# EAGLE board mouse_v3 (EAGLE 8.6.1)
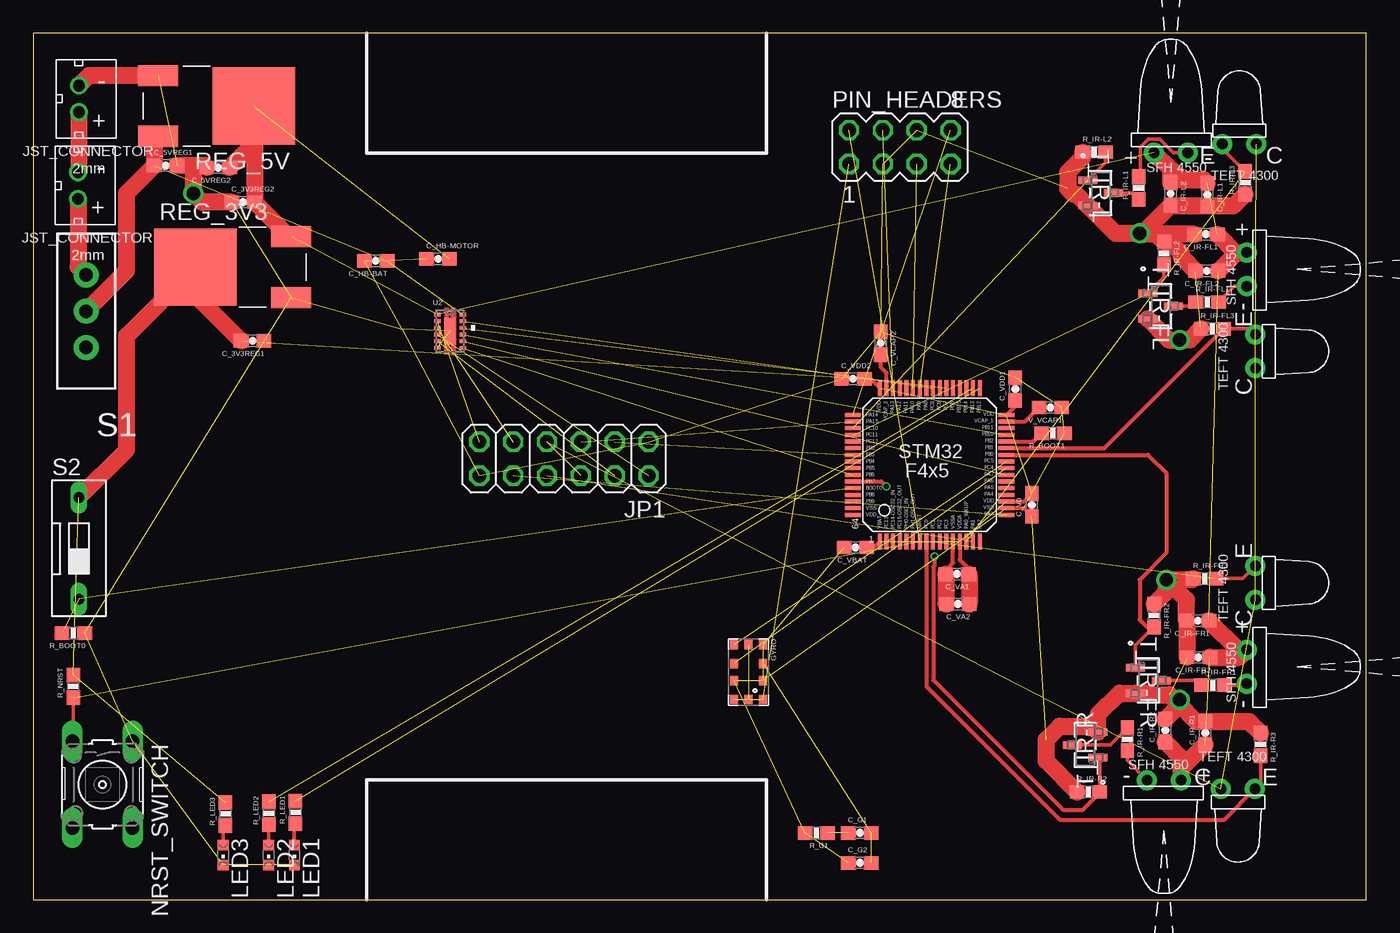
[diagram p0: board, top side]
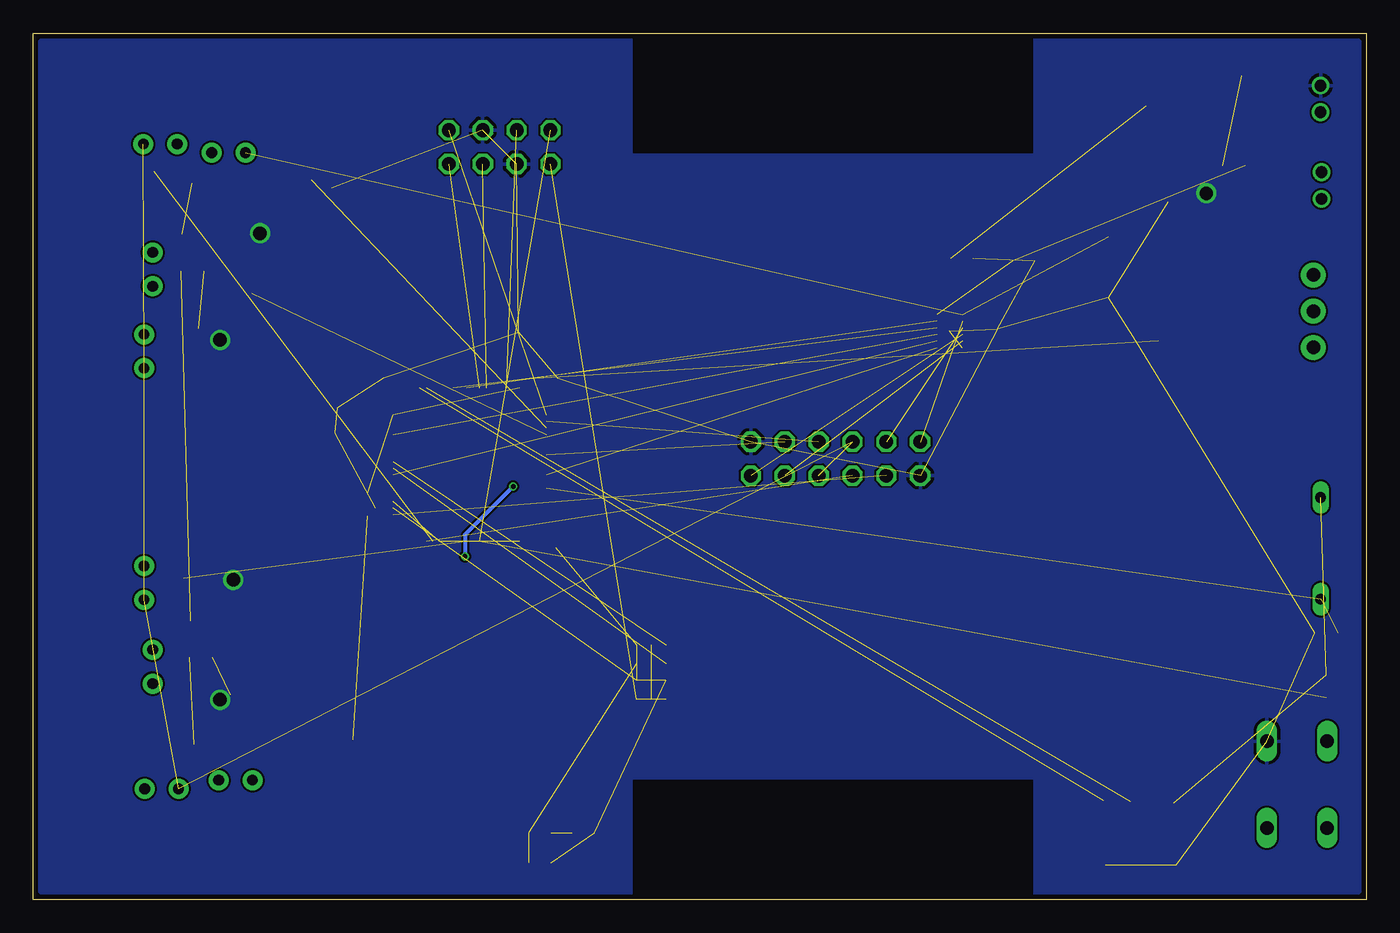
[diagram p1: board, bottom side, seen from below]

Size 100 x 65 mm. Coordinates in mm from the lower left corner, seen from the top.
Outline: 0,0 100,0 100,65 0,65 0,0
Copper layers (1*16): Top 0.035559375mm / dielectric 1.6mm / Bottom 0.035559375mm
Design rules "oshpark-2layer": minimum track width 6mil, minimum drill 10mil, track to track 6mil, track to pad 6mil, pad to pad 6mil, via to via 6mil, smd to smd 6mil, copper to edge 15mil, drill to drill 6mil, minimum pad ring 5mil, minimum via ring 5mil, stop-mask expansion 2.5mil, vias tented up to drill 0mil, thermal gap 10mil
tKeepout: area 25,56 to 55,65; area 25,0 to 55,9
bKeepout: area 25,0 to 55,9; area 25,56 to 55,65
tRestrict: area 25,0 to 55,9; area 25,56 to 55,65
bRestrict: area 25,0 to 55,9; area 25,56 to 55,65

## Footprints (pad centres in the part's own frame; a part is rotated, then mirrored left to right if it is on the bottom)
0603-CAP = smd 1.1 x 1: 1 -0.85,0; 2 0.85,0
10-TLGA = smd 0.7 x 0.6: 1 2.05,1.1; 2 0.635,1.1; 3 -0.635,1.1; 4 -2.05,1.1; 5 -2.05,0; 6 -2.05,-1.1; 7 -0.635,-1.1; 8 0.635,-1.1; 9 2.05,-1.1; 10 2.05,0
EMITTER = drill 0.8 pad 1.5: + -1.27,-0.5; - 1.27,-0.5
2X06 = drill 1.016 octagon: 1 -6.35,-1.27; 2 -6.35,1.27; 3 -3.81,-1.27; 4 -3.81,1.27; 5 -1.27,-1.27; 6 -1.27,1.27; 7 1.27,-1.27; 8 1.27,1.27; 9 3.81,-1.27; 10 3.81,1.27; 11 6.35,-1.27; 12 6.35,1.27
CHIPLED_0603 = smd 0.8 x 0.8: A 0,-0.75; C 0,0.75
B3F-10XX = drill 1.016 long: 1 -3.251,2.261; 2 3.251,2.261; 3 -3.251,-2.261; 4 3.251,-2.261
MA04-2 = drill 1.016 octagon: 1 -3.81,-1.27; 2 -3.81,1.27; 3 -1.27,-1.27; 4 -1.27,1.27; 5 1.27,-1.27; 6 1.27,1.27; 7 3.81,-1.27; 8 3.81,1.27
0603-RES = smd 1.1 x 1: 1 -0.85,0; 2 0.85,0
TO-252-3 = smd 3 x 1.6: 1 4.39,-2.285; 3 4.39,2.285 | smd 6.2 x 5.8: 4 -2.79,0
SWITCH-SPDT_KIT = drill 1.016 pad 1.88: 1 0,2.718; 2 0,0; 3 0,-2.718
DS-01 = drill 0.813 long: 1 0,-3.81; 2 0,3.81
SOT-23 = smd 0.559 x 1.422: 1 -0.953,-0.965; 2 0.953,-0.965; 3 0,0.965
DSS12_P9X2 = smd 0.5 x 0.28: 1 -0.959,1.25; 2 -0.959,0.75; 3 -0.959,0.25; 4 -0.959,-0.25; 5 -0.959,-0.75; 6 -0.959,-1.25; 7 0.959,-1.25; 8 0.959,-0.75; 9 0.959,-0.25; 10 0.959,0.25; 11 0.959,0.75; 12 0.959,1.25 | smd 0.9 x 2: 13 0,0
STM32F405/415_LQFP64 = smd 1.2 x 0.3: BOOT0 -5.75,-1.75; PA3 5.75,-3.75; PA4 5.75,-2.25; PA5 5.75,-1.75; PA6 5.75,-1.25; PA7 5.75,-0.75; PA14 -5.75,3.75; PA15 -5.75,3.25; PB0 5.75,0.75; PB1 5.75,1.25; PB2 5.75,1.75; PB3 -5.75,0.75; PB4 -5.75,0.25; PB5 -5.75,-0.25; PB6 -5.75,-0.75; PB7 -5.75,-1.25; PB8 -5.75,-2.25; PB9 -5.75,-2.75; PB10 5.75,2.25; PB11 5.75,2.75; PC4 5.75,-0.25; PC5 5.75,0.25; PC10 -5.75,2.75; PC11 -5.75,2.25; PC12 -5.75,1.75; PD2 -5.75,1.25; VCAP_1 5.75,3.25; VDD_0 5.75,-2.75; VDD_1 5.75,3.75; VDD_3 -5.75,-3.75; VSS_0 5.75,-3.25; VSS_1 -5.75,-3.25 | smd 0.3 x 1.2: NRST -0.75,-5.75; PA0_WKUP 2.75,-5.75; PA1 3.25,-5.75; PA2 3.75,-5.75; PA8 -0.25,5.75; PA9 -0.75,5.75; PA10 -1.25,5.75; PA11 -1.75,5.75; PA12 -2.25,5.75; PA13 -2.75,5.75; PB12 3.75,5.75; PB13 3.25,5.75; PB14 2.75,5.75; PB15 2.25,5.75; PC0 -0.25,-5.75; PC1 0.25,-5.75; PC2 0.75,-5.75; PC3 1.25,-5.75; PC6 1.75,5.75; PC7 1.25,5.75; PC8 0.75,5.75; PC9 0.25,5.75; PC13 -3.25,-5.75; PC14 -2.75,-5.75; PC15 -2.25,-5.75; PH0 -1.75,-5.75; PH1 -1.25,-5.75; VBAT -3.75,-5.75; VCAP_2 -3.25,5.75; VDD_2 -3.75,5.75; VDDA 2.25,-5.75; VSSA 1.75,-5.75
JST_CONNECTOR_FEMALE = drill 0.889: + 0,1; - 0,-1
RECEIVER = drill 0.8 pad 1.5: C 1.27,-0.5; E -1.27,-0.5
SPLITTER = smd 0.102 x 0.102: 1 0,0; 2 0,0

## Placement (x,y rotation side)
C_3V3REG1  10uF  [0603-CAP]  16.45,41.92 180 top
C_3V3REG2  0.1uF  [0603-CAP]  15.74,52.33 0 top
C_5VREG1  0.33uF  [0603-CAP]  9.93,55.08 0 top
C_5VREG2  0.1uF  [0603-CAP]  13.88,54.92 180 top
C_G1  470nF  [0603-CAP]  62,5 0 top
C_G2  10nF  [0603-CAP]  62,2.75 0 top
C_HB-BAT  0.1uF  [0603-CAP]  25.69,47.92 180 top
C_HB-MOTOR  0.1uF  [0603-CAP]  30.36,48.08 0 top
C_IR-FL1  0.1uF  [0603-CAP]  87.98,49.92 180 top
C_IR-FL2  4.7uF  [0603-CAP]  88.04,47.17 180 top
C_IR-FR1  0.1uF  [0603-CAP]  87.36,20.92 180 top
C_IR-FR2  4.7uF  [0603-CAP]  87.42,18.17 180 top
C_IR-L1  0.1uF  [0603-CAP]  88.08,52.89 270 top
C_IR-L2  4.7uF  [0603-CAP]  85.33,52.95 270 top
C_IR-R1  0.1uF  [0603-CAP]  87.92,12.49 90 top
C_IR-R2  4.7uF  [0603-CAP]  84.92,12.68 90 top
C_V0  0.1uF  [0603-CAP]  74.92,29.62 90 top
C_VA1  0.1uF  [0603-CAP]  69.31,24.42 180 top
C_VA2  4.7uF  [0603-CAP]  69.37,22.17 180 top
C_VBAT  0.1uF  [0603-CAP]  61.68,26.42 180 top
C_VCAP2  2.2uF  [0603-CAP]  63.58,41.74 270 top
C_VDD1  0.1uF  [0603-CAP]  73.67,38.31 90 top
C_VDD2  0.1uF  [0603-CAP]  61.5,39.08 0 top
GYRO  LY3200ALH  [10-TLGA]  53.65,17.07 270 top
IR_FL  EMITTER  [EMITTER]  91.54,47.29 270 top
IR_FR  EMITTER  [EMITTER]  91.54,17.47 270 top
IR_L  EMITTER  [EMITTER]  85.35,56.54 0 top
IR_R  EMITTER  [EMITTER]  84.83,8.46 180 top
JP1  [2X06]  39.81,33.08 180 top
LED1  BLUE  [CHIPLED_0603]  19.58,3.35 180 top
LED2  RED  [CHIPLED_0603]  17.66,3.35 180 top
LED3  GREEN  [CHIPLED_0603]  14.24,3.35 180 top
NRST_SWITCH  [B3F-10XX]  5.19,8.63 270 top
PIN_HEADERS  [MA04-2]  65.01,56.46 0 top
R_BOOT0  10K  [0603-RES]  3,20 180 top
R_BOOT1  10K  [0603-RES]  76.5,35 180 top
R_G1  10K  [0603-RES]  58.75,5 180 top
R_IR-FL1  51  [0603-RES]  88.07,44.83 0 top
R_IR-FL2  47K  [0603-RES]  84.83,48.49 270 top
R_IR-FL3  1.8K  [0603-RES]  88.45,42.83 0 top
R_IR-FR1  51  [0603-RES]  88.5,16.08 0 top
R_IR-FR2  47K  [0603-RES]  84.08,21.31 270 top
R_IR-FR3  1.8K  [0603-RES]  87.88,24.08 0 top
R_IR-L1  51  [0603-RES]  82.92,53.4 90 top
R_IR-L2  47K  [0603-RES]  79.59,56.08 0 top
R_IR-L3  1.8K  [0603-RES]  90.92,53.78 90 top
R_IR-R1  51  [0603-RES]  82.08,12.03 270 top
R_IR-R2  47K  [0603-RES]  79.16,8.08 0 top
R_IR-R3  1.8K  [0603-RES]  92.08,11.65 270 top
R_LED1  100  [0603-RES]  19.67,6.54 90 top
R_LED2  330  [0603-RES]  17.67,6.48 90 top
R_LED3  330  [0603-RES]  14.42,6.42 90 top
R_NRST  10K  [0603-RES]  3,16 90 top
REG_3V3  MC33269  [TO-252-3]  14.95,47.46 0 top
REG_5V  MC7805  [TO-252-3]  13.75,59.54 180 top
S1  [SWITCH-SPDT_KIT]  3.96,44.15 180 top
S2  [DS-01]  3.42,26.35 0 top
T_IR-FL  MMBF170LT1G  [SOT-23]  84.58,44.53 270 top
T_IR-FR  MMBF170LT1G  [SOT-23]  83.65,16.44 270 top
T_IR-L  MMBF170LT1G  [SOT-23]  80.08,53.02 270 top
T_IR-R  MMBF170LT1G  [SOT-23]  78.92,11.6 90 top
U2  DRV8835DSSR  [DSS12_P9X2]  31.26,42.65 0 top
U$1  STM32F405/415_LQFP64  [STM32F405/415_LQFP64]  67.26,32.62 0 top
U$2  JST_CONNECTOR_FEMALE  [JST_CONNECTOR_FEMALE]  3.42,60.08 180 top
U$3  JST_CONNECTOR_FEMALE  [JST_CONNECTOR_FEMALE]  3.35,53.58 180 top
U$4  RECEIVER  [RECEIVER]  90.48,57.19 0 top
U$5  RECEIVER  [RECEIVER]  92.19,41.14 270 top
U$6  RECEIVER  [RECEIVER]  92.19,23.76 270 top
U$7  RECEIVER  [RECEIVER]  90.38,7.81 180 top
U$8  SPLITTER  [SPLITTER]  27.66,42.81 0 top
V_VCAP1  2.2uF  [0603-CAP]  76.3,36.92 180 top

## Library data of the parts
C_3V3REG1 C_3V3REG2 C_5VREG1 C_5VREG2 C_G1 C_G2 C_HB-BAT C_HB-MOTOR C_IR-FL1 C_IR-FL2 C_IR-FR1 C_IR-FR2 C_IR-L1 C_IR-L2 C_IR-R1 C_IR-R2 C_V0 C_VA1 C_VA2 C_VBAT C_VCAP2 C_VDD1 C_VDD2 S1 V_VCAP1 = SparkFun
GYRO = LY3200ALH
IR_FL IR_FR IR_L IR_R U$4-U$7 = sfh4550 _ teft4300
JP1 = pinhead
LED1-LED3 = led
NRST_SWITCH = switch-omron; MPN: B3F-1000; OC_FARNELL: 176432; OC_NEWARK: 36M3542
PIN_HEADERS = con-lstb; OC_FARNELL: unknown; OC_NEWARK: unknown
R_BOOT0 R_BOOT1 R_G1 R_IR-FL1-R_IR-FL3 R_IR-FR1-R_IR-FR3 R_IR-L1-R_IR-L3 R_IR-R1-R_IR-R3 R_LED1-R_LED3 R_NRST = SparkFun-Resistors; PROD_ID: RES-09119
REG_3V3 REG_5V = MC33269
S2 = switch-dil; OC_FARNELL: unknown; OC_NEWARK: unknown
T_IR-FL T_IR-FR T_IR-L T_IR-R = MMBF170LT1; MANUFACTURER_PART_NUMBER: MMBF170LT1G; VENDOR: ON Semiconductor
U2 = DRV8835; MANUFACTURER_PART_NUMBER: DRV8835DSSR; VENDOR: Texas Instruments
U$1 = STM32F10x F4xx
U$2 U$3 = JST_CONNECTOR_FEMALE. through hole
U$8 = splitter

## Nets
3.3V: GYRO.1 GYRO.5 GYRO.9 GYRO.10 PIN_HEADERS.1
3V3: C_3V3REG1.2 C_V0.2 C_VA1.1 C_VA2.1 C_VBAT.1 C_VDD1.1 C_VDD2.2 R_LED3.2 R_NRST.2 REG_3V3.4 S2.2 U$1.VBAT U$1.VDD_0 U$1.VDD_1 U$1.VDD_2 U$1.VDDA
3V3_NUCLEO: JP1.6 JP1.7 U$4.C U$5.C U$6.C U$7.C
5V: C_3V3REG2.2 C_5VREG2.1 C_HB-MOTOR.2 C_IR-FL1.1 C_IR-FL2.1 C_IR-FR1.1 C_IR-FR2.1 C_IR-L1.1 C_IR-L2.1 C_IR-R1.1 C_IR-R2.1 IR_FL.+ IR_FR.+ IR_L.+ IR_R.+ REG_3V3.3 REG_5V.4 U2.1
AGND: C_VA1.2 C_VA2.2 U$1.VSSA
BAT: C_5VREG1.1 C_HB-BAT.1 REG_5V.3 S1.2 U2.12
BOOT0: R_BOOT0.2 S2.1 U$1.BOOT0
BOOT1: R_BOOT1.2 U$1.PB2
EMIT_FL: R_IR-FL2.2 T_IR-FL.1 U$1.PC11
EMIT_FR: R_IR-FR2.2 T_IR-FR.1 U$1.PB0
EMIT_L: R_IR-L2.2 T_IR-L.1 U$1.PC10
EMIT_R: R_IR-R2.2 T_IR-R.1 U$1.PB7
ENC_A1: JP1.5 U$1.PA15
ENC_A2: JP1.8 U$1.PA1
ENC_B1: JP1.3 U$1.PB3
ENC_B2: JP1.10 U$1.PA3
GND: C_3V3REG1.1 C_3V3REG2.1 C_5VREG1.2 C_5VREG2.2 C_G2.1 C_IR-FL1.2 C_IR-FL2.2 C_IR-FR1.2 C_IR-FR2.2 C_IR-L1.2 C_IR-L2.2 C_IR-R1.2 C_IR-R2.2 C_V0.1 C_VBAT.2 C_VCAP2.1 C_VDD1.2 C_VDD2.1 GYRO.2 GYRO.4 GYRO.8 JP1.1 JP1.12 LED1.C LED2.C LED3.C NRST_SWITCH.1 PIN_HEADERS.3 PIN_HEADERS.6 R_BOOT0.1 R_BOOT1.1 R_G1.2 R_IR-FL2.1 R_IR-FL3.1 R_IR-FR2.1 R_IR-FR3.1 R_IR-L2.1 R_IR-L3.1 R_IR-R2.1 R_IR-R3.1 REG_3V3.1 REG_5V.1 T_IR-FL.2 T_IR-FR.2 T_IR-L.2 T_IR-R.2 U$1.VSS_0 U$2.- U$8.2 V_VCAP1.1
GYRO: GYRO.6 U$1.PC5
HB_B1: U2.9 U$1.PB10
HB_B2: U2.7 U$1.PB6
HB_F1: U2.10 U$1.PC7
HB_F2: U2.8 U$1.PA7
HB_MODE: U2.11 U$1.PC9
LED1: R_LED1.2 U$1.PB12
LED2: R_LED2.2 U$1.PB13
M_B1: JP1.9 U2.3
M_B2: JP1.4 U2.5
M_F1: JP1.11 U2.2
M_F2: JP1.2 U2.4
MGND: C_HB-BAT.2 C_HB-MOTOR.1 U2.6 U2.13 U$8.1
N$2: C_VCAP2.2 U$1.VCAP_2
N$3: U$2.+ U$3.-
N$4: U$1.VCAP_1 V_VCAP1.2
N$5: C_G1.1 R_G1.1
N$6: S1.3 U$3.+
N$7: IR_FR.- R_IR-FR1.2
N$8: LED1.A R_LED1.1
N$9: C_G1.2 C_G2.2 GYRO.3
N$10: LED2.A R_LED2.1
N$11: LED3.A R_LED3.1
N$12: R_IR-FR1.1 T_IR-FR.3
N$15: IR_R.- R_IR-R1.2
N$17: IR_FL.- R_IR-FL1.2
N$22: R_IR-FL1.1 T_IR-FL.3
N$23: R_IR-R1.1 T_IR-R.3
N$24: IR_L.- R_IR-L1.2
N$25: R_IR-L1.1 T_IR-L.3
NRST: NRST_SWITCH.3 PIN_HEADERS.2 R_NRST.1 U$1.NRST
REC_FL: R_IR-FL3.2 U$1.PB1 U$5.E
REC_FR: R_IR-FR3.2 U$1.PC1 U$6.E
REC_L: R_IR-L3.2 U$1.PA0_WKUP U$4.E
REC_R: R_IR-R3.2 U$1.PC0 U$7.E
RX: PIN_HEADERS.5 U$1.PA10
SWCLK: PIN_HEADERS.8 U$1.PA14
SWDIO: PIN_HEADERS.4 U$1.PA13
TX: PIN_HEADERS.7 U$1.PA9
VREF_G: GYRO.7 U$1.PC4

## Tracks (layer width: path | path; a pad name or v marks a point on that pad's centre or on a via)
3.3V  (4 unrouted)
3V3  (7 unrouted)
  Top 0.305: U$1.VDD_1 73.67,37.03 C_VDD1.1 | U$1.VDD_0 74.32,29.87 C_V0.2 | C_VBAT.1 63.06,26.42 U$1.VBAT | C_VDD2.2 62.8,39.08 U$1.VDD_2 | U$1.VDDA 69.51,25.49 70.16,24.84 C_VA1.1
  Top 1.27: C_3V3REG1.2 12.16,45.36 REG_3V3.4 7,42.3 7,33.74 S2.2 | C_VA1.1 70.22,24.36 C_VA2.1
3V3_NUCLEO  (5 unrouted)
5V  (6 unrouted)
  Top 1.27: C_IR-FR1.1 90.39,18.74 IR_FR.+ 90.47,18.17 C_IR-FR2.1 | C_IR-R2.1 86.1,10.65 IR_R.+ 86.1,9.82 C_IR-R1.1 | C_IR-L2.1 85.33,54.79 | 85.33,54.79 IR_L.+ | C_IR-L1.1 87.82,54 86.12,54 85.33,54.79 | C_IR-FL2.1 90.28,48.56 | 90.28,48.56 IR_FL.+ | C_IR-FL1.1 90.19,48.56 90.28,48.56 | C_5VREG2.1 16.54,56.73 REG_5V.4 16.59,59.49 C_3V3REG2.2 19.18,49.74 REG_3V3.3
AGND
  Top 0.305: C_VA1.2 68.46,24.71 69.01,25.26 U$1.VSSA
  Top 1.27: C_VA1.2 68.46,22.23 C_VA2.2
BAT  (2 unrouted)
  Top 1.27: REG_5V.3 9.08,56.98 C_5VREG1.1 7,53 7,47.19 S1.2
BOOT0  (2 unrouted)
BOOT1
  Top 0.305: U$1.PB2 75.02,34.37 R_BOOT1.2
EMIT_FL  (1 unrouted)
  Top 0.254: T_IR-FL.1 84.83,46.7 R_IR-FL2.2
EMIT_FR
  Top 0.254: R_IR-FR2.2 82.69,19.07 T_IR-FR.1
  Top 0.305: U$1.PB0 83.63,33.37 85,32 85,26 83,24 83,21 83.54,20.46 R_IR-FR2.2
EMIT_L  (1 unrouted)
  Top 0.254: T_IR-L.1 80.44,55.3 R_IR-L2.2
EMIT_R  (via drill 0.35)
  Top 0.254: T_IR-R.1 80.01,10.52 R_IR-R2.2
  Top 0.305: U$1.PB7 63.63,31.37 v64,31 | v67.62,25.75 67.62,25.06 67.52,24.96 67.52,16.48 77,7 77.25,6.75 78.75,6.75 80.01,8.01 R_IR-R2.2
  Bottom 0.305: v64,31 67.62,27.38 v67.62,25.75
ENC_A1  (1 unrouted)
ENC_A2  (1 unrouted)
ENC_B1  (1 unrouted)
ENC_B2  (1 unrouted)
GND  (via drill 1)  (29 unrouted)
  Top 0.305: U$1.VSS_0 74.32,29.37 C_V0.1
  Top 1.27: C_IR-R2.2 86,14.61 | 86,14.61 v86,15 | 86,14.61 87.27,13.34 C_IR-R1.2 91.24,13.34 R_IR-R3.1 | 86,14.61 85.24,15.37 83.58,15.37 83.46,15.49 T_IR-FR.2 81.49,15.49 79.89,13.88 T_IR-R.2 79.44,13 77,13 76,12 76,10.39 R_IR-R2.1 | R_IR-FR2.1 85,23.08 v85,24 | R_IR-FR3.1 86.95,24 v85,24 | v85,24 86.51,22.49 C_IR-FR1.2 86.57,20.86 C_IR-FR2.2 | R_IR-L3.1 90.03,52.04 C_IR-L1.2 85.39,52.04 C_IR-L2.2 83.23,50 | 83.23,50 v83,50 81.18,50 T_IR-L.2 78.28,52.91 78.08,52.91 77.62,53.37 77.62,54.58 78.74,55.7 R_IR-L2.1 | 83.23,50 84.17,50 R_IR-FL2.1 85.29,49.34 86.12,48.52 86.12,48.24 C_IR-FL2.2 | C_IR-FL1.2 83.31,49.92 83.23,50 | T_IR-FL.2 85.19,42 v86,42 86.77,42 R_IR-FL3.1 | REG_5V.1 4.17,61.83 U$2.- | C_5VREG2.2 12.87,55.08 12,55.08 | 12,55.08 C_5VREG1.2 | 12,55.08 v12,53 12.67,52.33 C_3V3REG2.1
  pour Bottom: 1,65 0,64 0,1 1,0 99,0 100,1 100,64 99,65
GYRO  (1 unrouted)
HB_B1  (1 unrouted)
HB_B2  (1 unrouted)
HB_F1  (1 unrouted)
HB_F2  (1 unrouted)
HB_MODE  (1 unrouted)
LED1  (1 unrouted)
LED2  (1 unrouted)
M_B1  (1 unrouted)
M_B2  (1 unrouted)
M_F1  (1 unrouted)
M_F2  (1 unrouted)
MGND  (4 unrouted)
N$2
  Top 0.305: U$1.VCAP_2 64.01,39.49 63.58,39.92 C_VCAP2.2
N$3
  Top 1.27: U$2.+ 3.42,54.65 U$3.-
N$4
  Top 0.305: U$1.VCAP_1 74.4,35.87 V_VCAP1.2
N$5  (1 unrouted)
N$6
  Top 1.27: U$3.+ 3.35,47.48 S1.3
N$7
  Top 0.254: R_IR-FR1.2 90.92,16.08 IR_FR.-
N$8
  Top 0.254: LED1.A 19.58,5.6 R_LED1.1
N$9  (2 unrouted)
N$10
  Top 0.254: LED2.A R_LED2.1
N$11
  Top 0.254: LED3.A 14.24,5.39 R_LED3.1
N$12
  Top 0.254: R_IR-FR1.1 87.29,16.44 T_IR-FR.3
N$15
  Top 0.254: IR_R.- 82.08,10.44 R_IR-R1.2
N$17
  Top 0.254: R_IR-FL1.2 90.11,46.02 IR_FL.-
N$22
  Top 0.254: T_IR-FL.3 86.92,44.53 R_IR-FL1.1
N$23
  Top 0.254: T_IR-R.3 80.8,11.6 R_IR-R1.1
N$24
  Top 0.254: R_IR-L1.2 83.05,54.38 83.05,56.47 83.65,57.07 84.51,57.07 85.54,56.04 IR_L.-
N$25
  Top 0.254: T_IR-L.3 81.06,53 82.47,53 R_IR-L1.1
NRST  (2 unrouted)
  Top 0.254: R_NRST.1 3,11.95 NRST_SWITCH.3
REC_FL
  Top 0.254: R_IR-FL3.2 91.27,42.83 U$5.E
  Top 0.305: U$1.PB1 80.34,33.87 R_IR-FL3.2
REC_FR  (1 unrouted)
  Top 0.254: R_IR-FR3.2 90.74,24.08 U$6.E
REC_L  (1 unrouted)
  Top 0.254: R_IR-L3.2 89.21,56.34 U$4.E
REC_R
  Top 0.254: R_IR-R3.2 92.08,8.74 U$7.E
  Top 0.305: U$1.PC0 67.01,15.99 77,6 89.34,6 U$7.E
RX  (1 unrouted)
SWCLK  (1 unrouted)
SWDIO  (1 unrouted)
TX  (1 unrouted)
VREF_G  (1 unrouted)